# Altium PCB power_monitor.PcbDoc
Units mil, origin at the board's own origin, x right, y up, seen from the top; angles counter-clockwise.
Board outline 1000 x 1000 mil, 2 copper layers (Top Layer, Bottom Layer); 7 components, 6 nets, 28 pads, 0 vias.
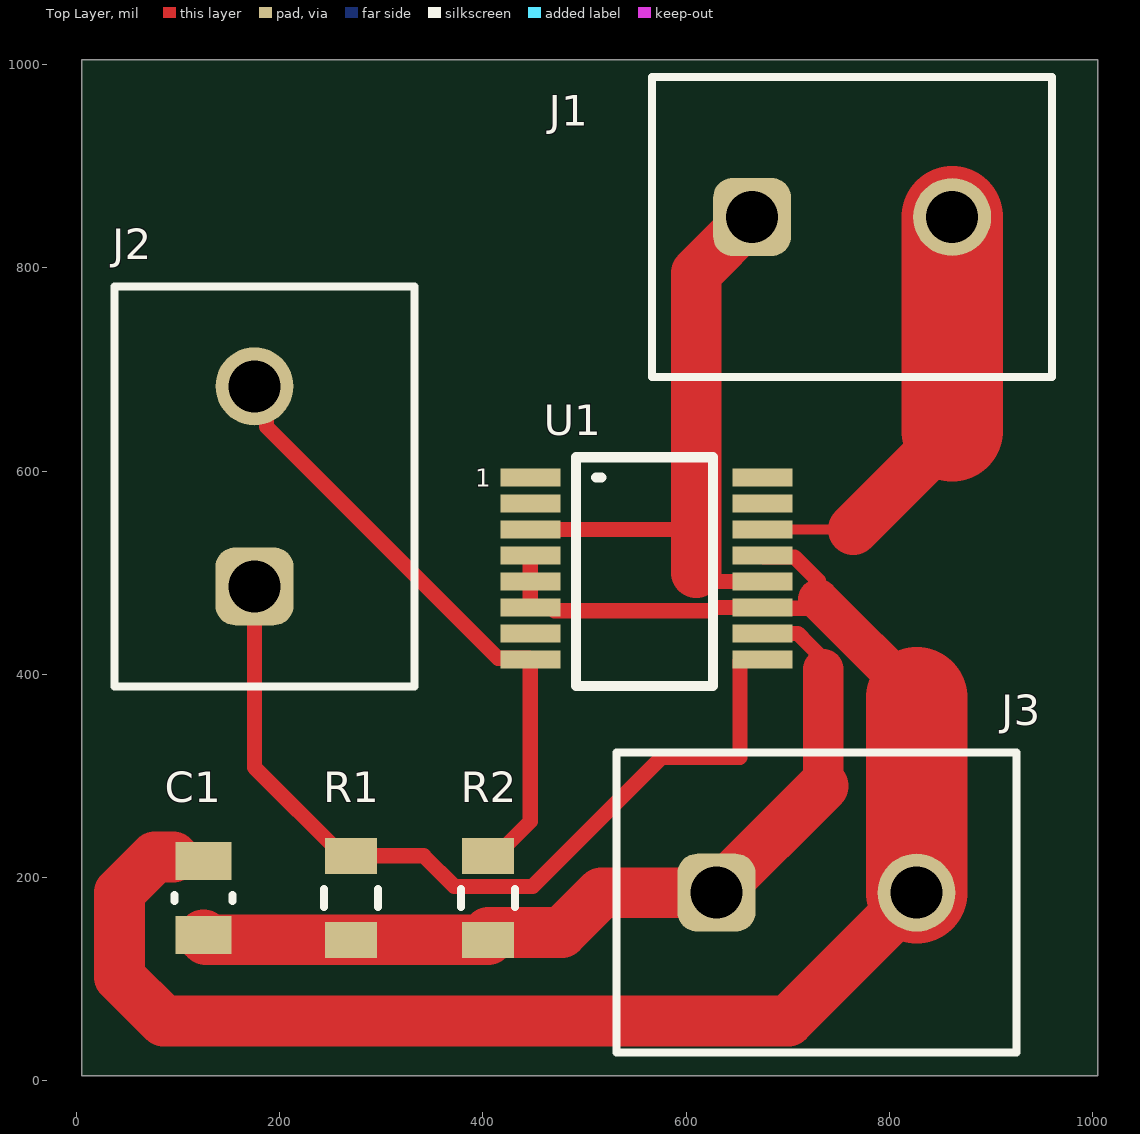
[diagram p0: Top Layer view]
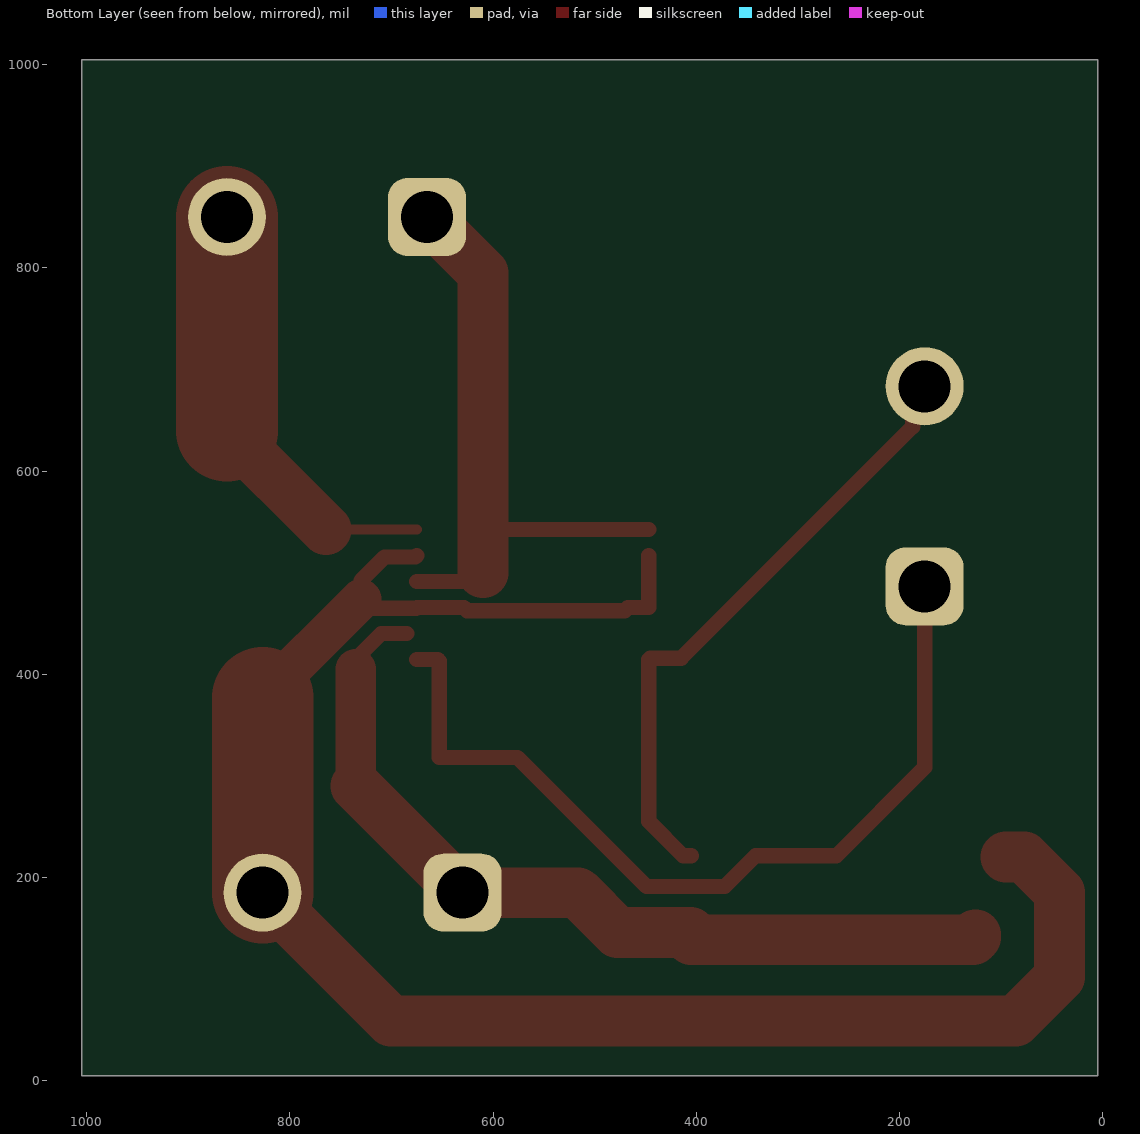
[diagram p1: Bottom Layer view, seen from below]
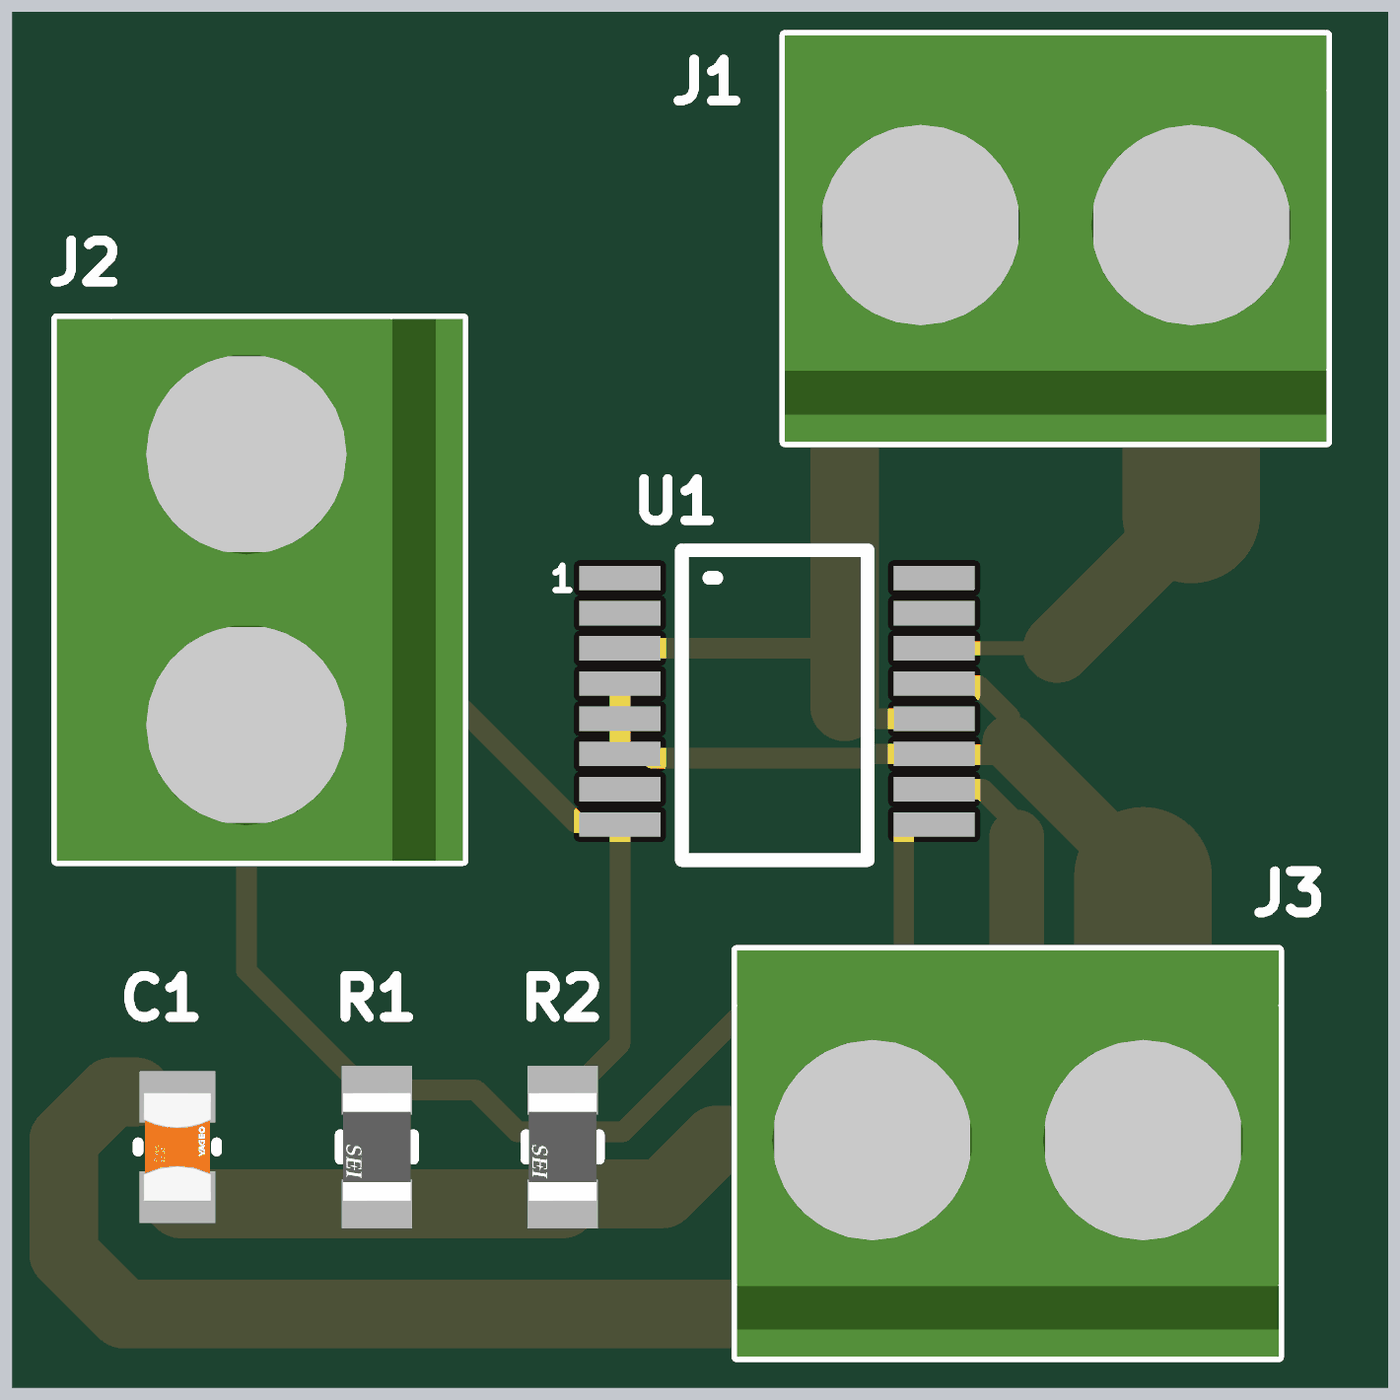
[diagram p2: 3D render of the assembled board from above, using the file's embedded part models]

## Layer stack, top to bottom
Top Solder: solder mask 0.4, Solder Resist, Dk 3.5
Top Layer: signal copper 1.4
Dielectric 1: dielectric 12.6, FR-4, Dk 4.8
Bottom Layer: signal copper 1.4
Bottom Solder: solder mask 0.4, Solder Resist, Dk 3.5

## Board outline
5,5 1005,5 1005,1005 5,1005

## Design rules (kind name [scope] priority, off if disabled: settings)
Clearance [All] p1: gap=5 ignorepadtopadclearanceinfootprint=FALSE
MinimumSolderMaskSliver [All] p1: minsoldermaskwidth=5
PolygonConnect [All] p1: connectstyle=Relief reliefconductorwidth=10 reliefentries=4 polygonreliefangle="90 Angle" airgapwidth=10
RoutingVias [All] p1: holewidth=28 width=50 viastyle="Through Hole" minholewidth=28 minwidth=50 maxholewidth=28 maxwidth=50
SilkToSilkClearance [All] p1: silktosilkclearance=5
SolderMaskExpansion [All] p1: expansion=4 istentingtop=FALSE
SupplyNets "Schematic Supply Nets_3" [InNet('VCC')] p1: voltage=0.000
SupplyNets "Schematic Supply Nets_2" [InNet('GND')] p2: voltage=0.000
SupplyNets "Schematic Supply Nets_1" [InNet('SCL')] p3: voltage=0.000
SupplyNets "Schematic Supply Nets" [InNet('SDA')] p4: voltage=0.000
Width [All] p1: maxlimit=1000 minlimit=10 preferedwidth=100
28 further rules are at their usual default settings.

## Classes and differential pairs
component class power_monitor: " J1" C1 J3 R1 R2 U1

## Components (designator, comment, footprint, x,y, rotation, side; value= is the part's Value field where it differs from the comment)
C1 "0.1 uF" FP-CC0805-0_85-MFG 125,180 r90 top value="100 nF"
J1 "" 691137710002 763.43,840.16 r0 top
J2 "" 691137710002 185,585 r90 top
J3 "" 691137710002 728.43,175.16 r0 top
R1 "10k" FP-RMCF0805-MFG 270,180 r270 top
R2 "10k" FP-RMCF0805-MFG 405,180 r270 top
U1 "INA260" INA260 446.65,593.54 r0 top (schematic designator U?)

## Footprints (in the part's own frame and the unit in brackets; to place one, negate y for a bottom-side part, rotate by r counter-clockwise, add the part's x,y. Pads: shape width x height; smd on the part's side, far side on the other; paste and mask are expansions set on the pad)
691137710002 [mm] "Horizontal Cable Entry with Pressure Clamp, pitch 5mm, 02p"
  rrect50% 1.95x1.95 hole 1.3: 1(-2.5,0.25)
  round 1.95 hole 1.3: 2(2.5,0.25)
  silkscreen extent -5,-3.75 5,3.75, body extent -5,-3.75 5,3.75, height 11.6
FP-CC0805-0_85-MFG [mm]
  rect 0.95x1.4 smd paste+0 mask+0: 1(-0.925,0) 2(0.925,0)
  silkscreen extent -0.08,-0.72 0.08,0.72, body extent -1.6,-1.05 1.6,1.05, height 0.25
FP-RMCF0805-MFG [mm]
  rect 0.9x1.3 smd paste+0 mask+0: 1(-1.05,0) 2(1.05,0)
  silkscreen extent -0.23,-0.67 0.23,0.67, body extent -1.6,-0.77 1.6,0.77, height 0.25
INA260 [mm]
  rect 1.5x0.45 smd: 1(0,0) 2(0,-0.65) 3(0,-1.3) 4(0,-1.95) 5(0,-2.6) 6(0,-3.25) 7(0,-3.9) 8(0,-4.55) 9(5.8,-4.55) 10(5.8,-3.9) 11(5.8,-3.25) 12(5.8,-2.6) 13(5.8,-1.95) 14(5.8,-1.3) 15(5.8,-0.65) 16(5.8,0)
  silkscreen extent 1.14,-5.21 4.57,0.51

## Part data
C1: library part CMP-2100-03606-3, "CAP CER 0.1UF 50V X7R 0805", Capacitance="100 nF", Manufacturer=Yageo, Manufacturer Part Number=CC0805KRX7R9BB104, Package=CC0805-0.85, Temperature="-30°C to +85°C", Temperature Characteristic=X7R, Temperature Range High=+85°C, Temperature Range Low=-30°C, Tolerance=0.1, Voltage Rating="50 V", Automotive=No, Category=Cap, ComponentLink2Description=Datasheet, ComponentLink2URL=http://www.yageo.com/documents/recent/UPY-GPHC_Y5V_6.3V-to-50V_8.pdf, Device Class L1="Passive Components", Device Class L2=Capacitors, Device Class L3="Ceramic Capacitors", Digikey Description="CAP CER 0.1UF 50V X7R 0805", Footprint Url=http://www.yageo.com/exep/pages/download/literatures/UPY-C_GEN_24.pdf, Height=0.95mm, Ipc Land Pattern Name=CAPC200125X85, Lead Free=Yes, Material=Ceramic, Mouser Description="Multilayer Ceramic Capacitors MLCC - SMD/SMT 100nF 50V X7R 10%", Octopart=https://octopart.com/cc0805krx7r9bb104-yageo-192993, RoHS=TRUE
J1 J2 J3: library part CMP-1502-03324-2, Current Rating=16A, Max Operating Temperature=120°C, Min Operating Temperature=-30°C, Voltage Rating=300V, Contact Material="Nickel, Tin", Height=11.6mm, Lead Pitch=5mm, NexarPartId=78871135, Number of Contacts=2, Number of Pins=2, Number of Rows=1, Packaging=Box, RoHS=Non-Compliant
R1 R2: library part CMP-26527-000121-1, "RES 10K OHM 1% 1/8W 0805", Case Code (Imperial)=0805, Case Code (Metric)=2012, Max Operating Temperature=155°C, Max Power Dissipation=125mW, Min Operating Temperature=-55°C, Resistance=10kR, Resistor Type="Thick Film", Temperature Coefficient=100ppm/°C, Tolerance=1%, Case/Package=0805, Construction=Rectangular, Contact Plating=Tin, Depth=1.25mm, Features="Automotive AEC-Q200", Height=0.026inch, Lead Free="Lead Free", Length=2mm, Military Standard=Not, Mount="Surface Mount", Number of Terminations=2, Packaging="Tape and Reel", Power Rating=125mW, Radiation Hardening=No, RoHS Compliant=Yes, Series=RMCF, Size Code=0805, Width=0.049inch

## Nets (pads, with @x,y where several pads share a name; then routed paths per layer and width w, separated by ;. In a path a pad name is that pad's centre, name@x,y a point inside that pad or via, vN(x,y) a via of type N, cw(c..) or ccw(c..) an arc to the next point about the centre after c; other vN are vias at no path point)
GND: C1.2 J3.2 U1.4 U1.5 U1.6 U1.11 U1.13 | length 1758.2
  Top Layer w15: U1.4 U1.5 U1.6 467.32,465.59 470.45,462.47 625.53,462.47 628.66,465.59 U1.11 675.59,465 721.21,465 730,473.79 730,492.24 706.83,515.41 676.36,515.41 U1.13
  Top Layer w40: 730,473.79 826.85,376.94
  Top Layer w50: 95,220 77.38,220 42.44,185.07 42.44,102.1 85.88,58.66 700.51,58.66 J3.2
  Top Layer w100: J3.2 826.85,376.94
"Net J1_1": J1.1 U1.3 U1.12 | length 605.9
  Top Layer w15: U1.3 607.36,542.36 610,545 ; 610,499.97 618.79,491.18 U1.12
  Top Layer w50: 610,499.97 610,545 610,795 J1.1
"Net J1_2": J1.2 U1.14 | length 437.5
  Top Layer w10: U1.14 764.53,542.36
  Top Layer w50: 764.53,542.36 861.85,639.69
  Top Layer w100: 861.85,639.69 J1.2
SCL: J2.1 R1.1 U1.9 | length 874.8
  Top Layer w15: J2.1 175.16,308.31 262.13,221.34 R1.1 341.71,221.34 371.93,191.12 449.01,191.12 575.9,318.01 652.97,318.01 652.97,413.05 654.33,414.41 U1.9
SDA: J2.2 R2.1 U1.8 | length 614.3
  Top Layer w15: J2.2 186.98,671.61 186.98,643.61 414.82,415.77 445.3,415.77 U1.8 446.65,255.12 412.87,221.34 R2.1
VCC: C1.1 J3.1 R1.2 R2.2 U1.10 | length 865.4
  Top Layer w15: U1.10@685,440 710,440 719.99,430.01 735,415 735,405
  Top Layer w40: 735,290 735,405
  Top Layer w50: C1.1 125,141.22 127.56,138.66 R1.2 R2.2 405,145.35 405.59,145.94 477.56,145.94 516.61,185 J3.1 735,290
pads on no net: U1.1 U1.2 U1.7 U1.15 U1.16

## Silkscreen, mask and mechanical layers (free items; w line width, h text height)
Mechanical 1:
  the board outline again, w10

## Text inside footprints (layer, text, board x,y; h text height)
U1: Top Overlay "1" at 392.56,584.45 h17.72